# Altium PCB LED8x8x8.PcbDoc
Units mm, origin at the board's own origin, x right, y up, seen from the top; angles counter-clockwise.
Board outline 127 x 101.6 mm, 4 copper layers (Top Layer, Internal Plane 1, Internal Plane 2, Bottom Layer); 21 components, 92 nets, 316 pads, 0 vias.
Unrouted connection lines stored in the file: 99.
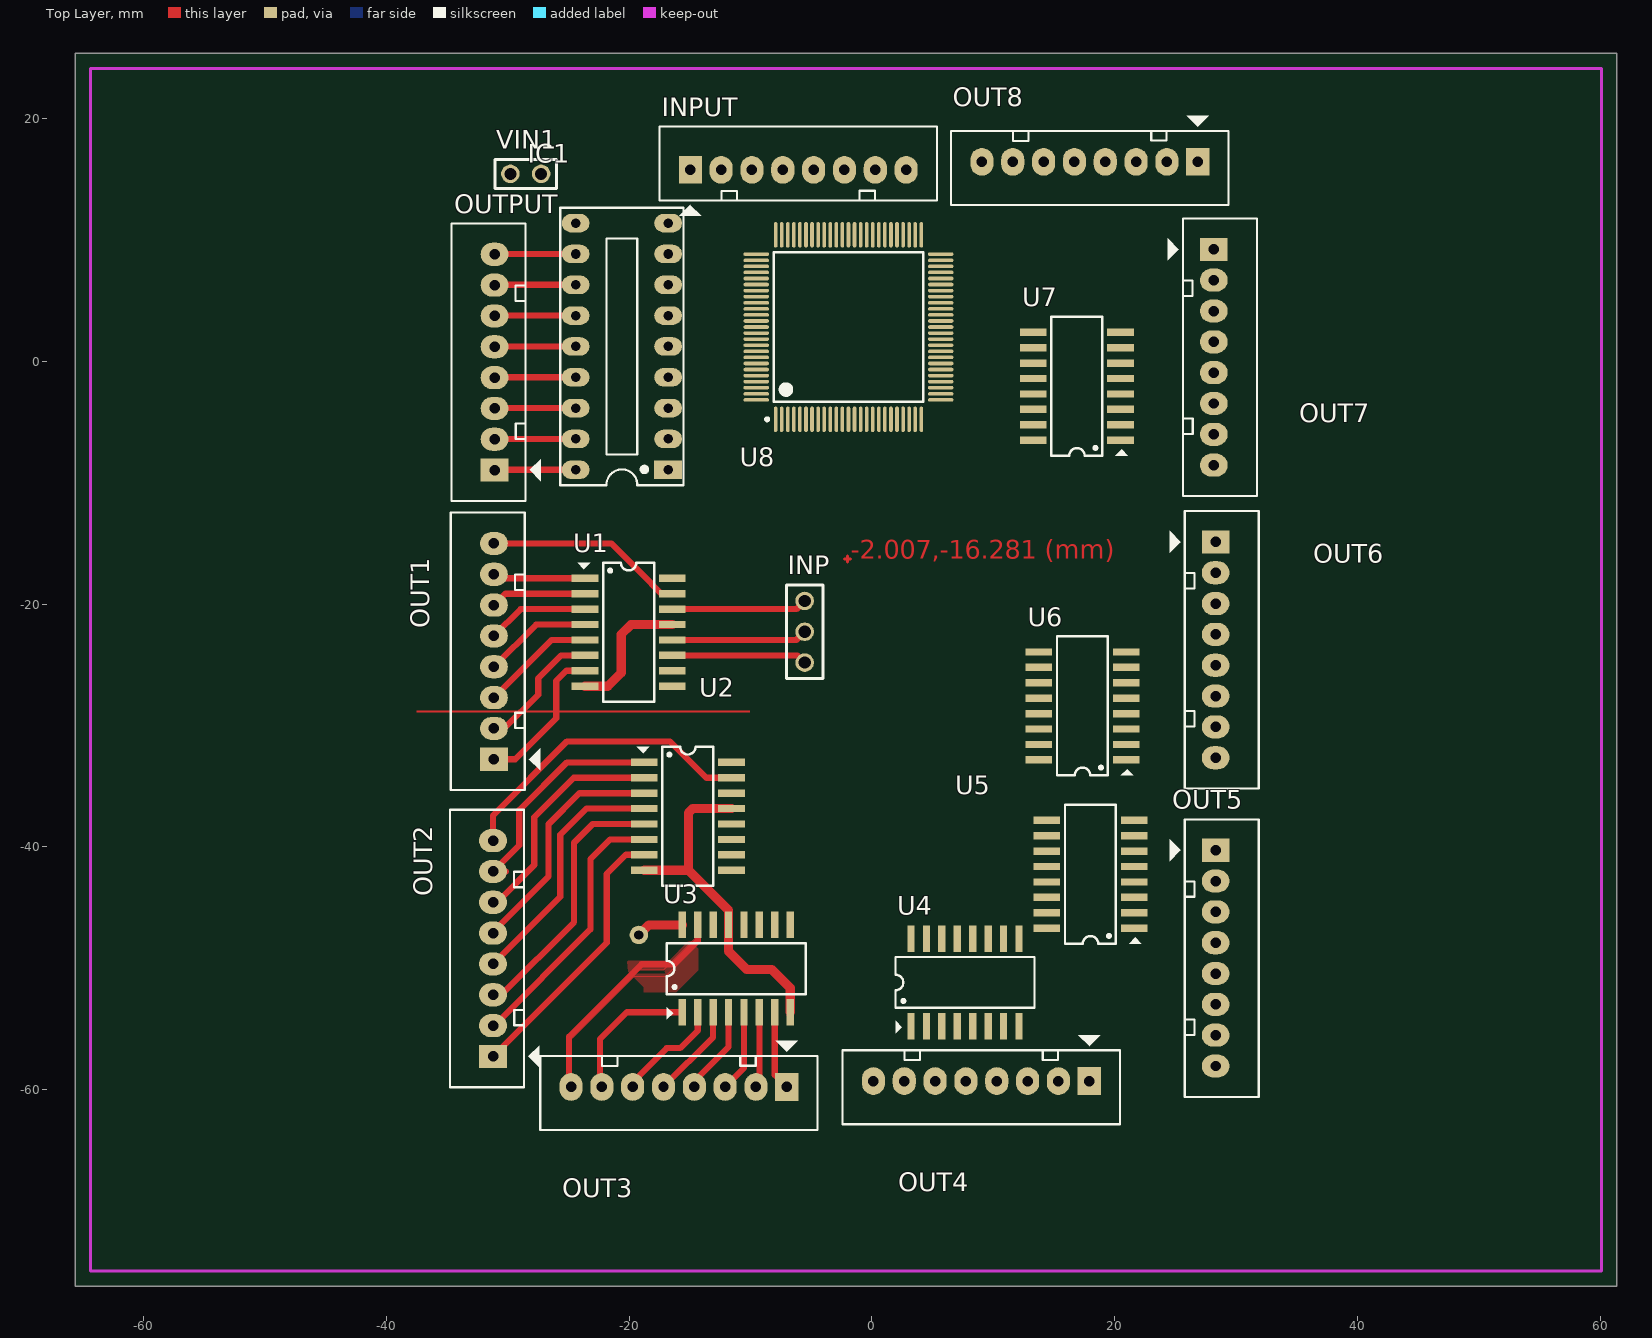
[diagram p0: Top Layer view]
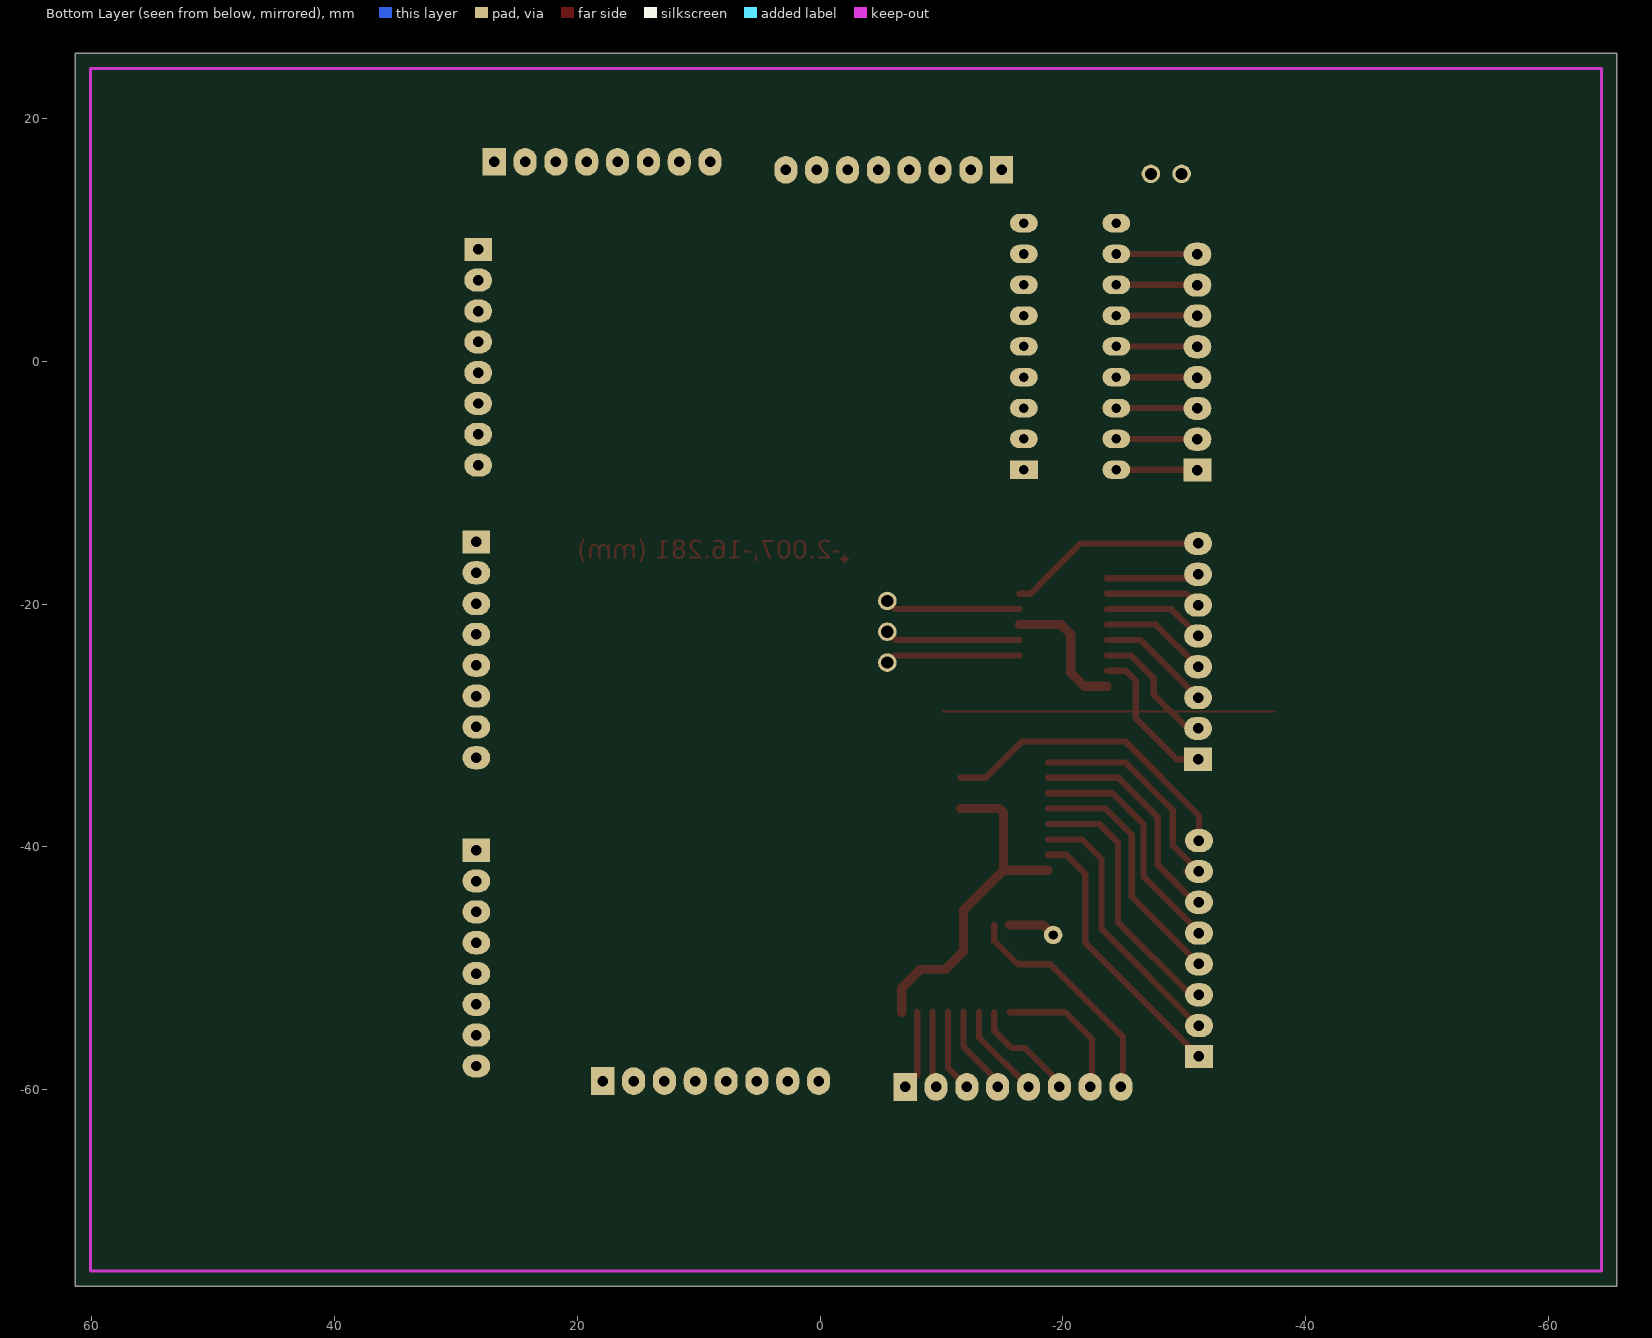
[diagram p1: Bottom Layer view, seen from below]
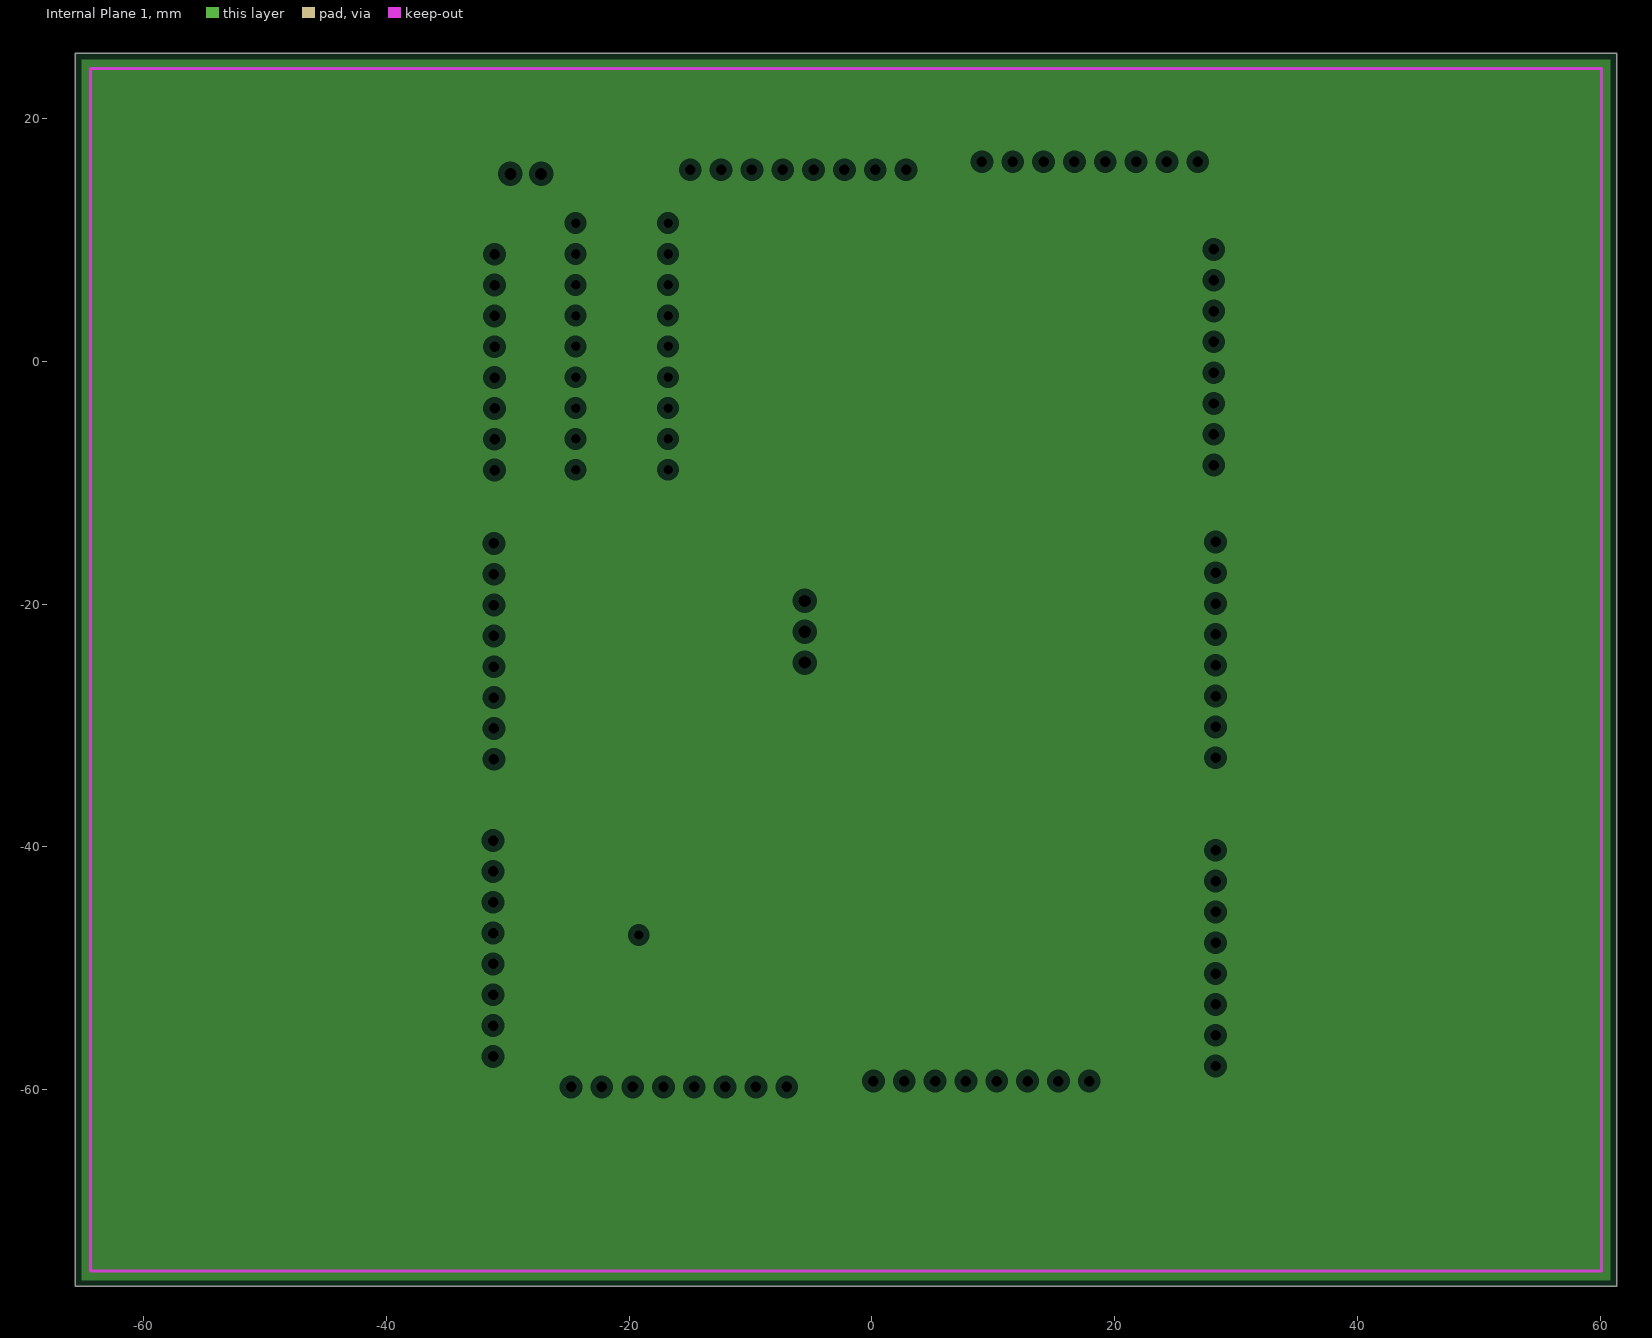
[diagram p2: Internal Plane 1, clearances drawn from the general rule]
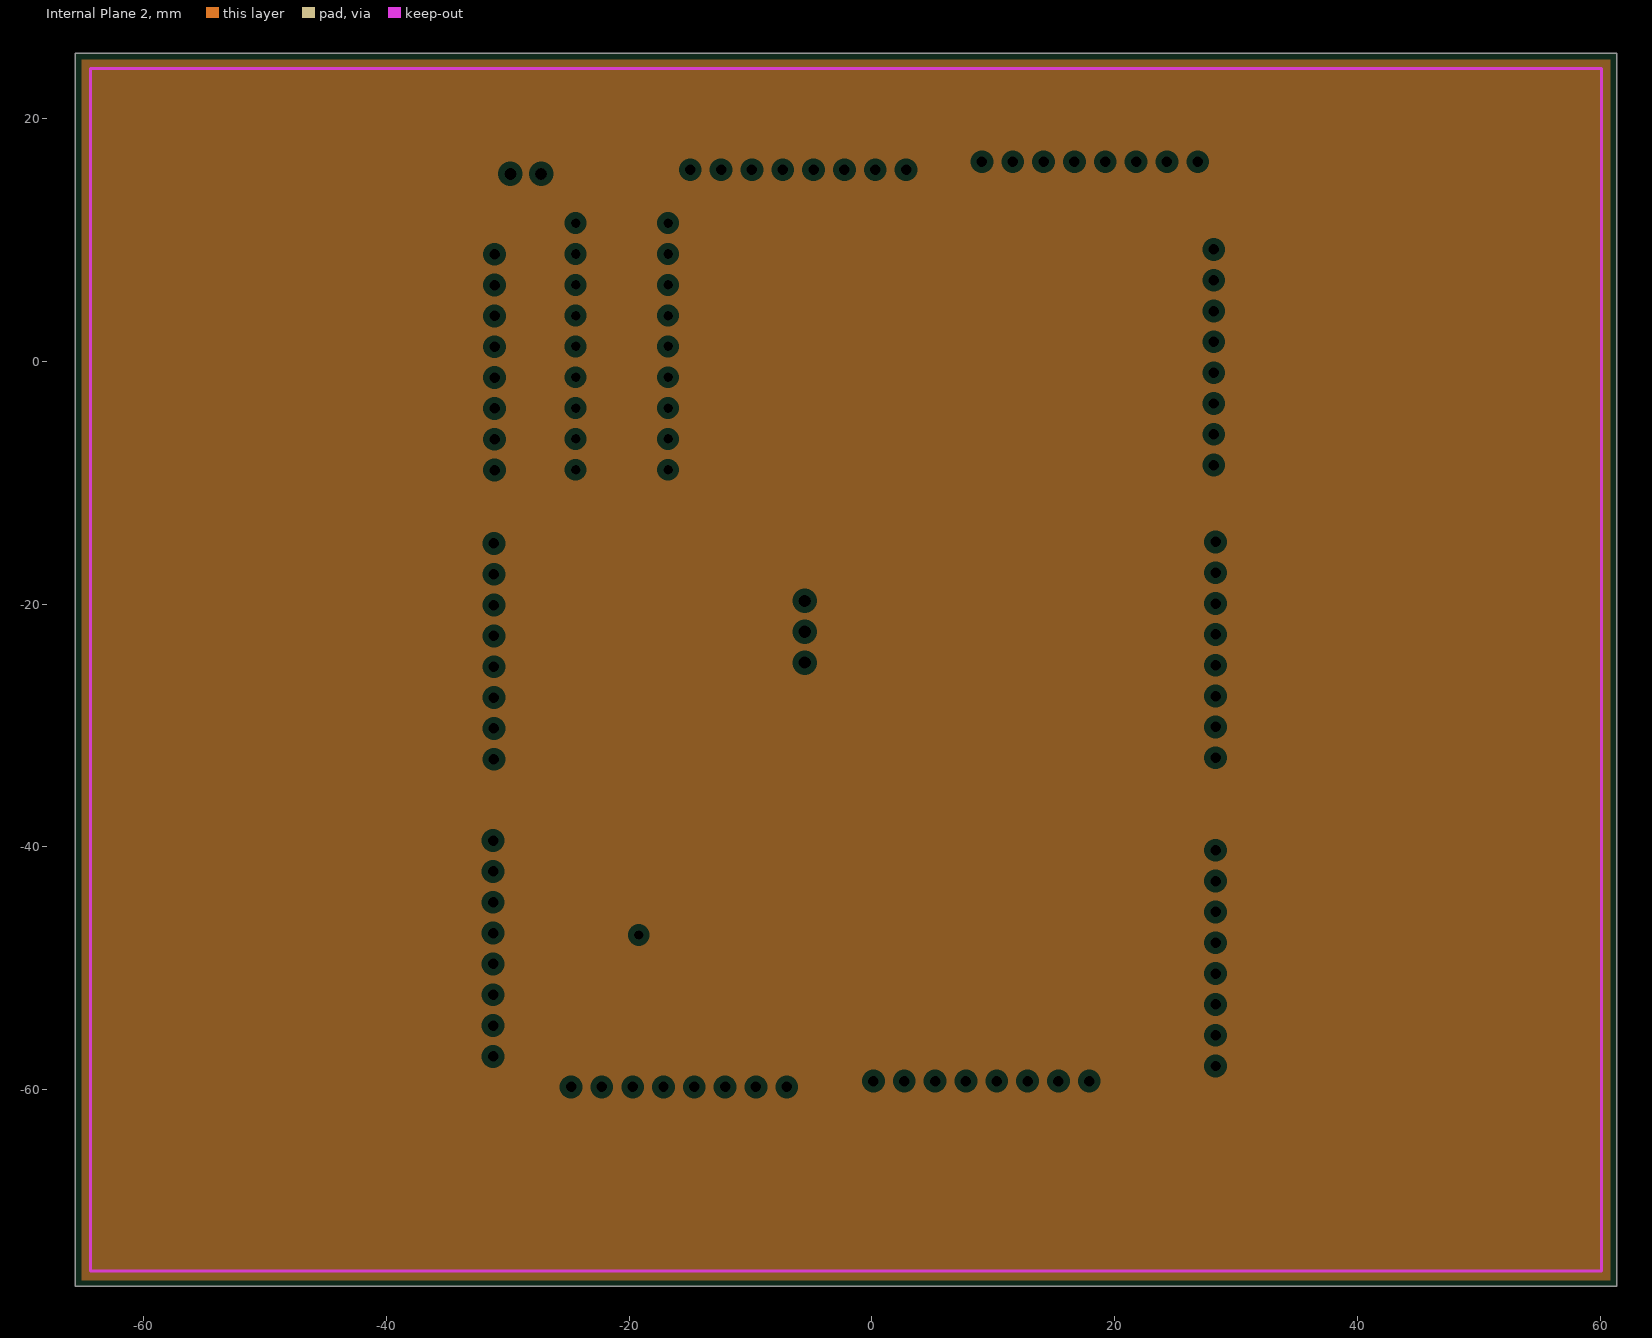
[diagram p3: Internal Plane 2, clearances drawn from the general rule]

## Layer stack, top to bottom
Top Layer: signal copper 0.0356
Dielectric: dielectric 0.32, FR-4, Dk 4.8
Internal Plane 1: plane copper 0.0356
Dielectric: dielectric 0.32, FR-4, Dk 4.8
Internal Plane 2: plane copper 0.0356
Dielectric: dielectric 0.32, FR-4, Dk 4.8
Bottom Layer: signal copper 0.0356

## Board outline
-65.634,-76.225 61.366,-76.225 61.366,25.375 -65.634,25.375

## Design rules (kind name [scope] priority, off if disabled: settings)
Clearance [All] p1: gap=0.305
PlaneClearance [All] p1: clearance=0.508
PlaneConnect [All] p1: planeconnectstyle=Relief reliefexpansion=0.508 reliefentries=4 reliefconductorwidth=0.254 reliefairgap=0.254
PolygonConnect [All] p1: connectstyle=Relief reliefconductorwidth=0.254 reliefentries=4 polygonreliefangle="90 Angle" airgapwidth=0.254
RoutingVias [All] p1: holewidth=0.635 width=1.016 viastyle="Through Hole" minholewidth=0.711 minwidth=1.27 maxholewidth=0.711 maxwidth=1.27
SilkToSolderMaskClearance SilkscreenOverComponentPads [IsPad] p1: minsilkscreentomaskgap=0.254 clearancetoexposedcopper=TRUE
SolderMaskExpansion [All] p1: expansion=0.051
Width Width_2 [InNet('GND2')] p1: maxlimit=0.762 minlimit=0.762 preferedwidth=0.762
Width Width_1 [InNet('VCC2')] p2: maxlimit=0.762 minlimit=0.762 preferedwidth=0.762
Width [All] p3: maxlimit=0.508 minlimit=0.508 preferedwidth=0.508
25 further rules are at their usual default settings.

## Components (designator, comment, footprint, x,y, rotation, side; value= is the part's Value field where it differs from the comment)
IC1 "ULN2803A" DIP18/W0.3 -16.789,-8.941 r90 top
INP "JP3" CON3 -5.537,-22.327 r90 top
INPUT "JP8" CON8 -14.961,15.773 r0 top
OUT1 "JP8" CON8 -31.14,-32.791 r90 top
OUT2 "JP8" CON8 -31.217,-57.277 r90 top
OUT3 "JP8" CON8 -7.01,-59.792 r180 top
OUT4 "JP8" CON8 17.907,-59.309 r180 top
OUT5 "JP8" CON8 28.321,-40.284 r270 top
OUT6 "JP8" CON8 28.321,-14.884 r270 top
OUT7 "JP8" CON8 28.169,9.22 r270 top
OUT8 "JP8" CON8 26.848,16.434 r180 top
OUTPUT "JP8" CON8 -31.09,-8.966 r90 top
U1 "74HC595" SOP16 -20.041,-22.327 r270 top
U2 "74HC595" SOP16 -15.164,-37.49 r270 top
U3 "74HC595" SOP16 -11.176,-50.038 r0 top
U4 "74HC595" SOP16 7.671,-51.181 r0 top
U5 "74HC595" SOP16 18.009,-42.266 r90 top
U6 "74HC595" SOP16 17.348,-28.397 r90 top
U7 "74HC595" SOP16 16.891,-2.057 r90 top
U8 "74HC595" TQFP-100-14x14 -1.93,2.819 r90 top
VIN1 "JP2" CON2 -28.55,15.443 r180 top

## Footprints (in the part's own frame and the unit in brackets; to place one, negate y for a bottom-side part, rotate by r counter-clockwise, add the part's x,y. Pads: shape width x height; smd on the part's side, far side on the other; paste and mask are expansions set on the pad)
CON2 [mil] "2-Pin Connector; pitch 2.54mm"
  round 60 hole 39.37: 1(-51.18,0) 2(48.82,0)
  silkscreen extent -102,-46 99,48
CON3 [mil] "3-Pin Connector; pitch 2.54mm"
  round 60 hole 39.37: 1(-98.43,0) 2(1.57,0) 3(101.57,0)
  silkscreen extent -150,-59 154,59
CON8 [mil] "CON8"
  rect 75x90 hole 34: 1(0,0)
  oval 75x90 hole 34: 2(100,0) 3(200,0) 4(300,0) 5(400,0) 6(500,0) 7(600,0) 8(700,0)
  silkscreen extent -100,-150 800,140
DIP18/W0.3 [mil] "18 PIN, W 300mil, Pin to pin 100mil"
  rect 60x90 hole 31: 1(0,0)
  oval 60x90 hole 31: 2(100,0) 3(200,0) 4(300,0) 5(400,0) 6(500,0) 7(600,0) 8(700,0) 9(800,0) 10(800,300) 11(700,300) 12(600,300) 13(500,300) 14(400,300) 15(300,300) 16(200,300) 17(100,300) 18(0,300)
  silkscreen extent -50,-50 850,350, body extent -51,-57 849,356, height 119
SOP16 [mm] "Small Outline; 16 Leads; Body Width 5.6 mm; Pitch 1.27 mm"
  rect 0.6x2.2 smd: 1(-4.445,-3.6) 2(-3.175,-3.6) 3(-1.905,-3.6) 4(-0.635,-3.6) 5(0.635,-3.6) 6(1.905,-3.6) 7(3.175,-3.6) 8(4.445,-3.6) 9(4.445,3.6) 10(3.175,3.6) 11(1.905,3.6) 12(0.635,3.6) 13(-0.635,3.6) 14(-1.905,3.6) 15(-3.175,3.6) 16(-4.445,3.6)
  silkscreen extent -5.73,-4.19 5.73,2.1
TQFP-100-14x14 [mm] "Thin QFP, 100-Leads, Body 14x14mm, Pitch 0.5mm, IPC Low Density"
  oval 2.1x0.3 smd: 1(-7.6,6) 2(-7.6,5.5) 3(-7.6,5) 4(-7.6,4.5) 5(-7.6,4) 6(-7.6,3.5) 7(-7.6,3) 8(-7.6,2.5) 9(-7.6,2) 10(-7.6,1.5) 11(-7.6,1) 12(-7.6,0.5) 13(-7.6,0) 14(-7.6,-0.5) 15(-7.6,-1) 16(-7.6,-1.5) 17(-7.6,-2) 18(-7.6,-2.5) 19(-7.6,-3) 20(-7.6,-3.5) 21(-7.6,-4) 22(-7.6,-4.5) 23(-7.6,-5) 24(-7.6,-5.5) 25(-7.6,-6) 51(7.6,-6) 52(7.6,-5.5) 53(7.6,-5) 54(7.6,-4.5) 55(7.6,-4) 56(7.6,-3.5) 57(7.6,-3) 58(7.6,-2.5) 59(7.6,-2) 60(7.6,-1.5) 61(7.6,-1) 62(7.6,-0.5) 63(7.6,0) 64(7.6,0.5) 65(7.6,1) 66(7.6,1.5) 67(7.6,2) 68(7.6,2.5) 69(7.6,3) 70(7.6,3.5) 71(7.6,4) 72(7.6,4.5) 73(7.6,5) 74(7.6,5.5) 75(7.6,6)
  oval 0.3x2.1 smd: 26(-6,-7.6) 27(-5.5,-7.6) 28(-5,-7.6) 29(-4.5,-7.6) 30(-4,-7.6) 31(-3.5,-7.6) 32(-3,-7.6) 33(-2.5,-7.6) 34(-2,-7.6) 35(-1.5,-7.6) 36(-1,-7.6) 37(-0.5,-7.6) 38(0,-7.6) 39(0.5,-7.6) 40(1,-7.6) 41(1.5,-7.6) 42(2,-7.6) 43(2.5,-7.6) 44(3,-7.6) 45(3.5,-7.6) 46(4,-7.6) 47(4.5,-7.6) 48(5,-7.6) 49(5.5,-7.6) 50(6,-7.6) 76(6,7.6) 77(5.5,7.6) 78(5,7.6) 79(4.5,7.6) 80(4,7.6) 81(3.5,7.6) 82(3,7.6) 83(2.5,7.6) 84(2,7.6) 85(1.5,7.6) 86(1,7.6) 87(0.5,7.6) 88(0,7.6) 89(-0.5,7.6) 90(-1,7.6) 91(-1.5,7.6) 92(-2,7.6) 93(-2.5,7.6) 94(-3,7.6) 95(-3.5,7.6) 96(-4,7.6) 97(-4.5,7.6) 98(-5,7.6) 99(-5.5,7.6) 100(-6,7.6)
  silkscreen extent -7.72,-6.15 6.15,6.82, body extent -7,-7 7,7, height 1.6

## Part data
IC1: "High-Voltage, High-Current Darlington Array"
INP: library part Con3, "Connector 3"
INPUT OUT1 OUT2 OUT3 OUT4 OUT5 OUT6 OUT7 OUT8 OUTPUT: library part Con8, "Connector 8"
VIN1: library part Con2, "Connector 2"

## Free pads (board coordinates)
  round 1.524 hole 0.762: 1(-19.202,-47.269)

## Nets (pads, with @x,y where several pads share a name; then routed paths per layer and width w, separated by ;. In a path a pad name is that pad's centre, name@x,y a point inside that pad or via, vN(x,y) a via of type N, cw(c..) or ccw(c..) an arc to the next point about the centre after c; other vN are vias at no path point)
GND2: IC1.9 U1.8 U1.13 U2.8 U2.13 U3.8 U3.13 U4.8 U4.13 U5.8 U5.13 U6.8 U6.13 U7.8 U7.13 U8.8 U8.13 VIN1.1 | length 39.6
  Top Layer w0.762: U1.8 -21.768,-26.772 -20.65,-25.654 -20.65,-22.504 -19.837,-21.692 U1.13 ; U2.8 -15.113,-41.935 ; U2.13 -14.757,-36.855 -15.113,-37.211 -15.113,-41.935 ; U3.8 -6.731,-51.638 -8.255,-50.114 -10.312,-50.114 -11.811,-48.616 U3.13 -11.811,-45.237 -15.113,-41.935
NetIC1_1: IC1.1 INPUT.8
NetIC1_2: IC1.2 INPUT.7
NetIC1_3: IC1.3 INPUT.6
NetIC1_4: IC1.4 INPUT.5
NetIC1_5: IC1.5 INPUT.4
NetIC1_6: IC1.6 INPUT.3
NetIC1_7: IC1.7 INPUT.2
NetIC1_8: IC1.8 INPUT.1
NetIC1_11: IC1.11 OUTPUT.8 | length 6.7
  Top Layer w0.508: OUTPUT.8@-31.064,8.839 IC1.11
NetIC1_12: IC1.12 OUTPUT.7 | length 6.7
  Top Layer w0.508: OUTPUT.7@-31.064,6.299 IC1.12
NetIC1_13: IC1.13 OUTPUT.6 | length 6.7
  Top Layer w0.508: OUTPUT.6@-31.064,3.759 IC1.13
NetIC1_14: IC1.14 OUTPUT.5 | length 6.7
  Top Layer w0.508: OUTPUT.5@-31.064,1.219 IC1.14
NetIC1_15: IC1.15 OUTPUT.4 | length 6.7
  Top Layer w0.508: OUTPUT.4@-31.064,-1.321 IC1.15
NetIC1_16: IC1.16 OUTPUT.3 | length 6.7
  Top Layer w0.508: OUTPUT.3@-31.064,-3.861 IC1.16
NetIC1_17: IC1.17 OUTPUT.2 | length 6.7
  Top Layer w0.508: OUTPUT.2@-31.064,-6.401 IC1.17
NetIC1_18: IC1.18 OUTPUT.1 | length 6.7
  Top Layer w0.508: OUTPUT.1@-31.064,-8.941 IC1.18
NetINP_1: INP.2 U1.12 U2.12 U3.12 U4.12 U5.12 U6.12 U7.12 U8.12 | length 11.2
  Top Layer w0.508: U1.12 -6.212,-22.962 INP.2
NetINP_2: INP.1 U1.11 U2.11 U3.11 U4.11 U5.11 U6.11 U7.11 U8.11 | length 11.1
  Top Layer w0.508: U1.11 -6.132,-24.232 INP.1
NetINP_3: INP.3 U1.14 | length 11.2
  Top Layer w0.508: U1.14 -6.212,-20.422 INP.3
NetOUT1_1: OUT1.1 U1.7 | length 12.3
  Top Layer w0.508: OUT1.1 -29.388,-32.791 -26.01,-29.413 -26.01,-26.34 -25.171,-25.502 U1.7
NetOUT1_2: OUT1.2 U1.6 | length 10.8
  Top Layer w0.508: OUT1.2 -30.277,-30.251 -27.495,-27.47 -27.495,-26.124 -25.603,-24.232 U1.6
NetOUT1_3: OUT1.3 U1.5 | length 9.5
  Top Layer w0.508: OUT1.3 -26.391,-22.962 U1.5
NetOUT1_4: OUT1.4 U1.4 | length 8.9
  Top Layer w0.508: OUT1.4 -27.661,-21.692 U1.4
NetOUT1_5: OUT1.5 U1.3 | length 8.4
  Top Layer w0.508: OUT1.5 -28.931,-20.422 U1.3
NetOUT1_6: OUT1.6 U1.2 | length 7.9
  Top Layer w0.508: OUT1.6 -30.201,-19.152 U1.2
NetOUT1_7: OUT1.7 U1.1 | length 7.6
  Top Layer w0.508: OUT1.7 -30.81,-17.882 U1.1
NetOUT2_1: OUT2.1 U2.7 | length 22.7
  Top Layer w0.508: OUT2.1 -21.844,-47.904 -21.844,-42.24 -20.269,-40.665 U2.7
NetOUT2_2: OUT2.2 U2.6 | length 22.2
  Top Layer w0.508: OUT2.2 -31.134,-54.737 -23.19,-46.793 -23.19,-41.021 -21.565,-39.395 U2.6
NetOUT2_3: OUT2.3 U2.5 | length 22.1
  Top Layer w0.508: OUT2.3 -30.531,-52.197 -24.536,-46.203 -24.536,-39.649 -23.012,-38.125 U2.5
NetOUT2_4: OUT2.4 U2.4 | length 20.7
  Top Layer w0.508: OUT2.4 -25.679,-44.12 -25.679,-39.014 -23.52,-36.855 U2.4
NetOUT2_5: OUT2.5 U2.3 | length 19.8
  Top Layer w0.508: OUT2.5 -31.217,-46.996 -26.645,-42.424 -26.645,-38.125 -24.105,-35.585 U2.3
NetOUT2_6: OUT2.6 U2.2 | length 19
  Top Layer w0.508: OUT2.6 -30.886,-44.577 -27.813,-41.504 -27.813,-37.567 -24.562,-34.315 U2.2
NetOUT2_7: OUT2.7 U2.1 | length 18.9
  Top Layer w0.508: OUT2.7@-30.15,-42.037 OUT2.7 -29.058,-39.878 -29.058,-36.982 -25.121,-33.045 U2.1
NetOUT3_1: OUT3.1 U3.7 | length 6.6
  Top Layer w0.508: U3.7 -8.001,-58.801 OUT3.1
NetOUT3_2: OUT3.2 U3.6 | length 6.3
  Top Layer w0.508: OUT3.2 -9.271,-59.512 U3.6
NetOUT3_3: OUT3.3 U3.5 | length 6.8
  Top Layer w0.508: OUT3.3 -10.541,-58.242 U3.5
NetOUT3_4: OUT3.4 U3.4 | length 7.3
  Top Layer w0.508: OUT3.4 -14.63,-59.309 -11.811,-56.49 U3.4
NetOUT3_5: OUT3.5 U3.3 | length 7.8
  Top Layer w0.508: OUT3.5 -13.081,-55.702 U3.3
NetOUT3_6: OUT3.6 U3.2 | length 9
  Top Layer w0.508: OUT3.6 -19.71,-59.385 -16.916,-56.591 -15.799,-56.591 -14.351,-55.143 U3.2
NetOUT3_7: OUT3.7 U3.1 | length 11.4
  Top Layer w0.508: OUT3.7@-22.733,-59.309 -22.403,-58.979 -22.403,-55.855 -20.186,-53.638 U3.1 ; OUT3.7 -22.2,-59.842 OUT3.7@-22.123,-59.842
NetOUT4_1: OUT4.1 U4.7
NetOUT4_2: OUT4.2 U4.6
NetOUT4_3: OUT4.3 U4.5
NetOUT4_4: OUT4.4 U4.4
NetOUT4_5: OUT4.5 U4.3
NetOUT4_6: OUT4.6 U4.2
NetOUT4_7: OUT4.7 U4.1
NetOUT5_1: OUT5.1 U5.7
NetOUT5_2: OUT5.2 U5.6
NetOUT5_3: OUT5.3 U5.5
NetOUT5_4: OUT5.4 U5.4
NetOUT5_5: OUT5.5 U5.3
NetOUT5_6: OUT5.6 U5.2
NetOUT5_7: OUT5.7 U5.1
NetOUT6_1: OUT6.1 U6.7
NetOUT6_2: OUT6.2 U6.6
NetOUT6_3: OUT6.3 U6.5
NetOUT6_4: OUT6.4 U6.4
NetOUT6_5: OUT6.5 U6.3
NetOUT6_6: OUT6.6 U6.2
NetOUT6_7: OUT6.7 U6.1
NetOUT7_1: OUT7.1 U7.7
NetOUT7_2: OUT7.2 U7.6
NetOUT7_3: OUT7.3 U7.5
NetOUT7_4: OUT7.4 U7.4
NetOUT7_5: OUT7.5 U7.3
NetOUT7_6: OUT7.6 U7.2
NetOUT7_7: OUT7.7 U7.1
NetOUT8_1: OUT8.1 U8.7
NetOUT8_2: OUT8.2 U8.6
NetOUT8_3: OUT8.3 U8.5
NetOUT8_4: OUT8.4 U8.4
NetOUT8_5: OUT8.5 U8.3
NetOUT8_6: OUT8.6 U8.2
NetOUT8_7: OUT8.7 U8.1
NetU1_9: U1.9 U2.14
NetU2_9: U2.9 U3.14
NetU3_9: U3.9 U4.14
NetU5_9: U5.9 U6.14
NetU6_9: U6.9 U7.14
NetU7_9: U7.9 U8.14
Q01: OUT1.8 U1.15 | length 16.4
  Top Layer w0.508: OUT1.8 -21.463,-15.011 -18.099,-18.375 -18.099,-18.413 -17.361,-19.152 U1.15
Q02: OUT2.8 U2.15 | length 25.5
  Top Layer w0.508: OUT2.8 -31.217,-37.414 -25.121,-31.318 -16.637,-31.318 -13.64,-34.315 U2.15
Q03: OUT3.8 U3.15 | length 19.4
  Top Layer w0.508: OUT3.8 -24.943,-59.639 -24.943,-55.651 -18.974,-49.682 -16.281,-49.682 -14.351,-47.752 U3.15
Q04: OUT4.8 U4.15
Q05: OUT5.8 U5.15
Q06: OUT6.8 U6.15
Q07: OUT7.8 U7.15
Q08: OUT8.8 U8.15
QH4: U4.9 U5.14
VCC2: IC1.10 pad.1 U1.10 U1.16 U2.10 U2.16 U3.10 U3.16 U4.10 U4.16 U5.10 U5.16 U6.10 U6.16 U7.10 U7.16 U8.10 U8.16 VIN1.2 | length 3.9
  Top Layer w0.762: pad.1 -18.371,-46.438 U3.16
pads on no net: U8.9 U8.17 U8.18 U8.19 U8.20 U8.21 U8.22 U8.23 U8.24 U8.25 U8.26 U8.27 U8.28 U8.29 U8.30 U8.31 U8.32 U8.33 U8.34 U8.35 U8.36 U8.37 U8.38 U8.39 U8.40 U8.41 U8.42 U8.43 U8.44 U8.45 U8.46 U8.47 U8.48 U8.49 U8.50 U8.51 U8.52 U8.53 U8.54 U8.55 U8.56 U8.57 U8.58 U8.59 U8.60 U8.61 U8.62 U8.63 U8.64 U8.65 U8.66 U8.67 U8.68 U8.69 U8.70 U8.71 U8.72 U8.73 U8.74 U8.75 U8.76 U8.77 U8.78 U8.79 U8.80 U8.81 U8.82 U8.83 U8.84 U8.85 U8.86 U8.87 U8.88 U8.89 U8.90 U8.91 U8.92 U8.93 U8.94 U8.95 U8.96 U8.97 U8.98 U8.99 U8.100
copper on no net: | length 1
  Top Layer w0.254: -2.261,-16.281 -1.753,-16.281 ; -2.007,-16.535 -2.007,-16.027

## Polygon pours and split planes (outlines as drawn)
Q03 on Top Layer "Top Layer-No Net 1" (solid, remove dead copper, pour order 14): -20.168,-49.378 -16.713,-49.378 -15.011,-47.676 -14.3,-48.387 -14.3,-48.743 -14.3,-50.165 -14.808,-50.673 -16.129,-51.994 -18.796,-51.994 -18.796,-51.587 -20.091,-50.292
Q03 on Top Layer "Top Layer-No Net 1" (solid, remove dead copper, pour order 10): -14.605,-47.625 -14.63,-47.625 -17.145,-50.14 -17.17,-50.165 -19.761,-50.165 -19.761,-50.267 -24.536,-55.042 -24.689,-55.194 -24.689,-55.753 -24.663,-55.753 -19.609,-50.698 -19.583,-50.673 -16.942,-50.673 -16.942,-50.648 -14.097,-47.803 -14.097,-47.549
no net on Internal Plane 1 (split plane): 60.856,-75.715 -65.123,-75.715 -65.123,24.864 60.856,24.864
no net on Internal Plane 2 (split plane): 60.856,-75.715 -65.123,-75.715 -65.123,24.864 60.856,24.864

## Keep-outs
Keep-Out Layer:
  lines w0.254: -64.364,-74.955 60.096,-74.955 60.096,24.105 -64.364,24.105 -64.364,-74.955

## Other copper
Top Layer:
  rectangle: -37.516,-28.956 -10.033,-28.778
  text "-2.007,-16.281 (mm)" at -1.753,-16.281 h1.52

## Dimensions
-64.364,-74.955 to 60.096,-74.955 on Mechanical 1
-64.364,-74.955 to -64.364,24.105 on Mechanical 1